# EAGLE board Eyetron (EAGLE 9.5.1)
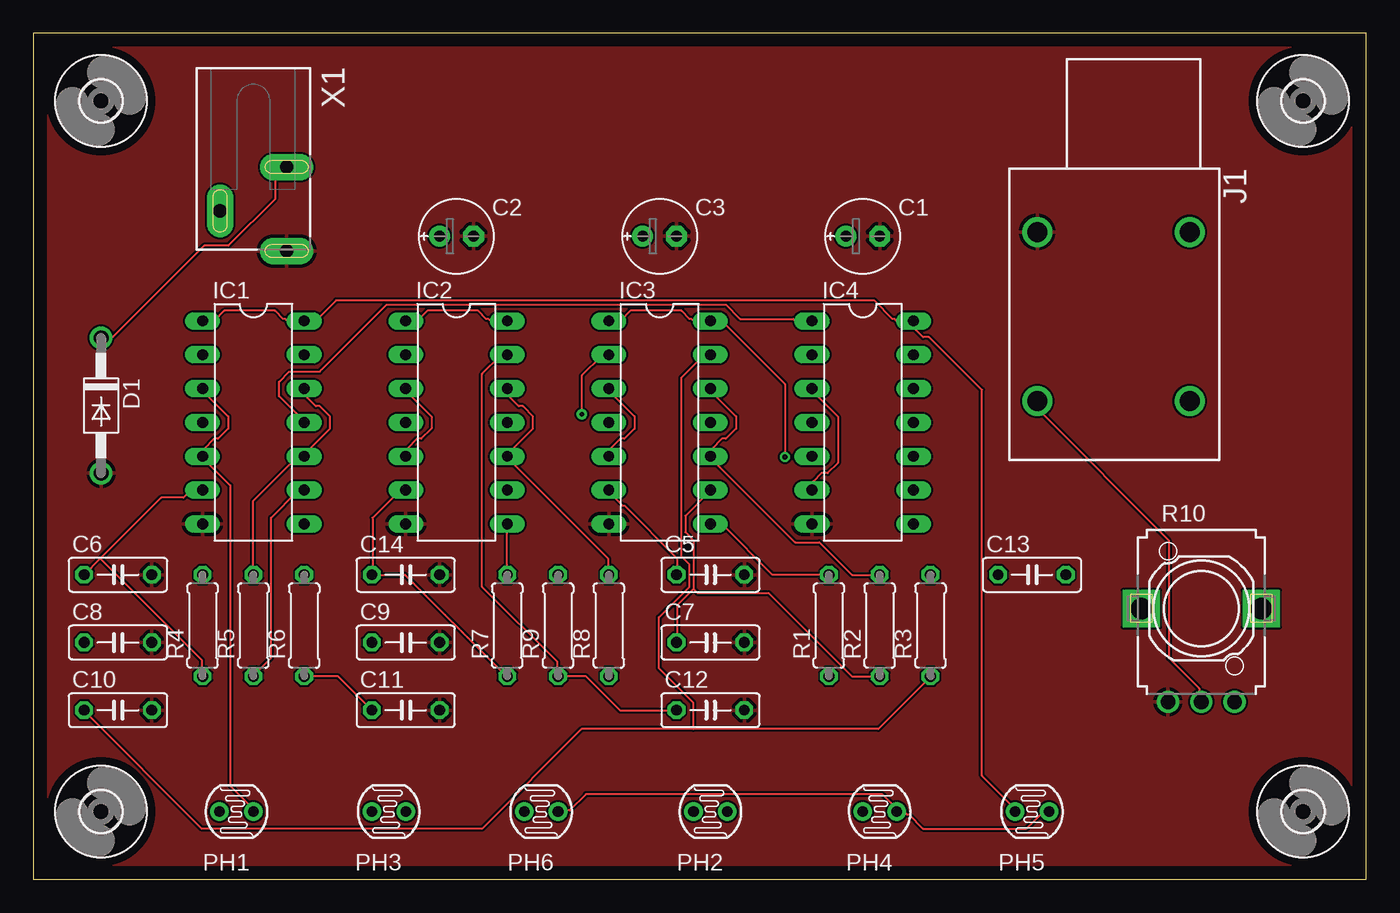
[diagram p0: board, top side]
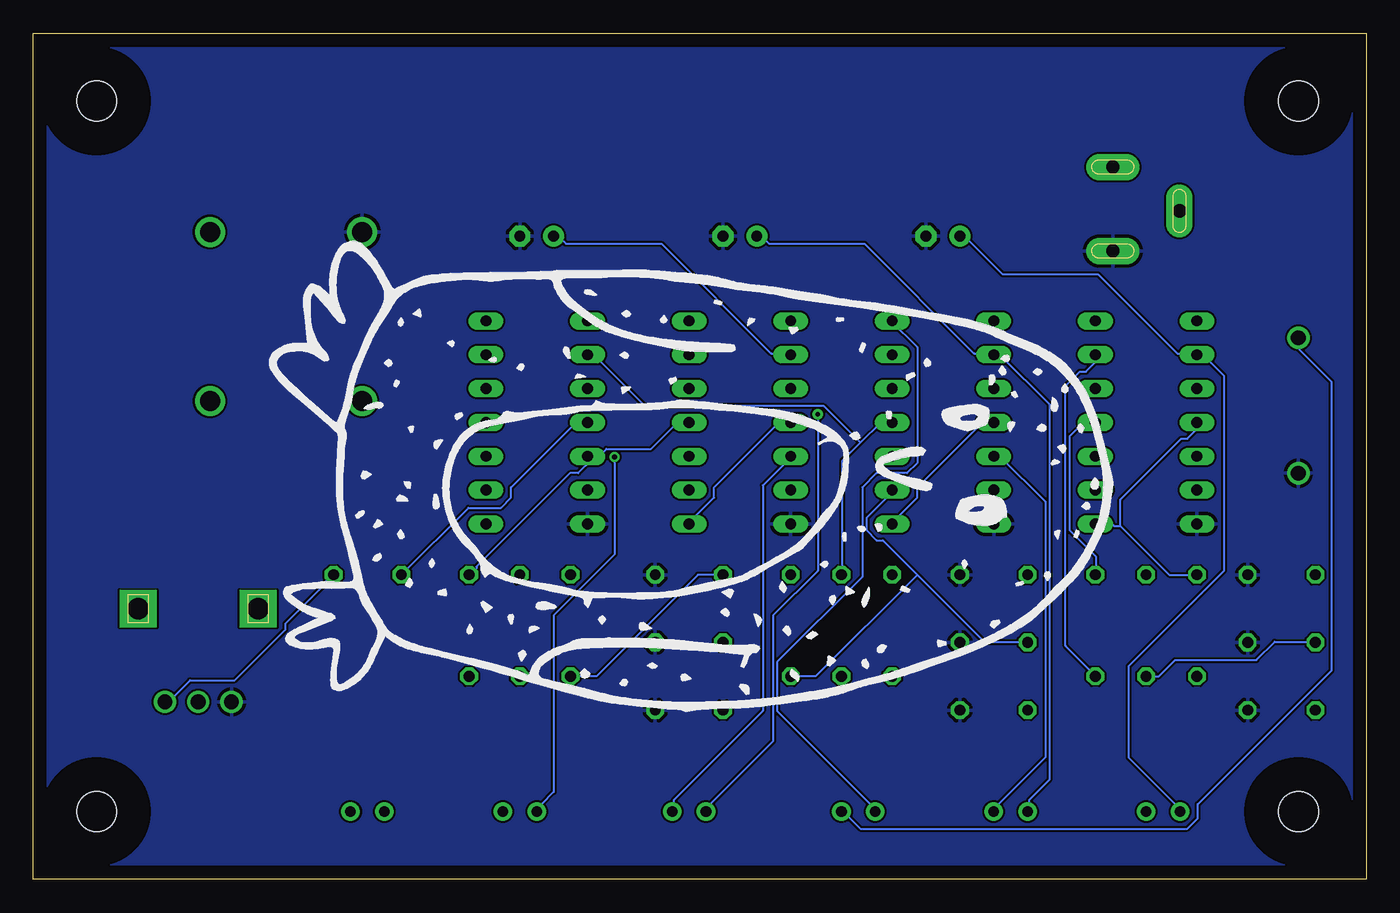
[diagram p1: board, bottom side, seen from below]

Size 100 x 63.49 mm. Coordinates in mm from the lower left corner, seen from the top.
Outline: 0,0 100,0 100,63.49 0,63.49 0,0
Copper layers (1*16): Top 0.035mm / dielectric 1.5mm / Bottom 0.035mm
Design rules "default": minimum track width 6mil, minimum drill 0.35mm, track to track 6mil, track to pad 6mil, pad to pad 6mil, via to via 6mil, smd to smd 6mil, copper to edge 40mil, drill to drill 6mil, minimum pad ring 10mil, minimum via ring 8mil, stop-mask expansion 4mil, vias tented up to drill 0mil, thermal gap 10mil

## Footprints (pad centres in the part's own frame; a part is rotated, then mirrored left to right if it is on the bottom)
E2,5-6E = drill 0.813 pad 1.575: + -1.27,0 | drill 0.813 pad 1.575 octagon: - 1.27,0
C050-025X075 = drill 0.813 octagon: 1 -2.54,0; 2 2.54,0
DO41-10 = drill 1.118: A 5.08,0; C -5.08,0
3,0 = hole 3: 0,0
DIL14 = drill 0.813 long: 1 -7.62,-3.81; 2 -5.08,-3.81; 3 -2.54,-3.81; 4 0,-3.81; 5 2.54,-3.81; 6 5.08,-3.81; 7 7.62,-3.81; 8 7.62,3.81; 9 5.08,3.81; 10 2.54,3.81; 11 0,3.81; 12 -2.54,3.81; 13 -5.08,3.81; 14 -7.62,3.81
NEUTRIK-NRJ4HM-1 = drill 1.5: S 7.23,4.75; SN -4.2,4.75; T 7.23,17.45; TN -4.2,17.45
VT900 = drill 0.8 pad 1.4: 1 -1.27,0; 2 1.27,0
0207/7 = drill 0.813 octagon: 1 -3.81,0; 2 3.81,0
EVUFXL = drill 1.1 pad 1.676: 1 -2.5,-7; 2 0,-7; 3 2.5,-7 | drill 1.6 pad 2.8 square: M1 4.5,0; M2 -4.5,0
SCD-014-A = drill 1 pad 2 long: 1 -2.5,13.8; 2 -2.5,7.5; 3 2.5,10.8

## Placement (x,y rotation side)
C1  100uf  [E2,5-6E]  62.23,48.26 0 top
C2  100uf  [E2,5-6E]  31.75,48.26 0 top
C3  100uf  [E2,5-6E]  46.99,48.26 0 top
C5  10uf  [C050-025X075]  50.8,22.86 0 top
C6  10uf  [C050-025X075]  6.35,22.86 0 top
C7  1uf  [C050-025X075]  50.8,17.78 0 top
C8  1uf  [C050-025X075]  6.35,17.78 0 top
C9  1uf  [C050-025X075]  27.94,17.78 0 top
C10  0.1uf  [C050-025X075]  6.35,12.7 0 top
C11  0.1uf  [C050-025X075]  27.94,12.7 0 top
C12  0.1uf  [C050-025X075]  50.8,12.7 0 top
C13  0.1uf  [C050-025X075]  74.93,22.86 0 top
C14  10uf  [C050-025X075]  27.94,22.86 0 top
D1  1N4001  [DO41-10]  5.08,35.56 270 top
H1  MOUNT-HOLE3.0  [3,0]  5.08,58.42 0 top
H2  MOUNT-HOLE3.0  [3,0]  5.08,5.08 0 top
H3  MOUNT-HOLE3.0  [3,0]  95.25,58.42 0 top
H4  MOUNT-HOLE3.0  [3,0]  95.25,5.08 0 top
IC1  4093N  [DIL14]  16.51,34.29 270 top
IC2  4093N  [DIL14]  31.75,34.29 270 top
IC3  4093N  [DIL14]  46.99,34.29 270 top
IC4  4077N  [DIL14]  62.23,34.29 270 top
J1  [NEUTRIK-NRJ4HM-1]  82.55,53.34 180 top
PH1  [VT900]  15.24,5.08 0 top
PH2  [VT900]  50.8,5.08 0 top
PH3  [VT900]  26.67,5.08 0 top
PH4  [VT900]  63.5,5.08 0 top
PH5  [VT900]  74.93,5.08 0 top
PH6  [VT900]  38.1,5.08 0 top
R1  22k  [0207/7]  59.69,19.05 90 top
R2  22k  [0207/7]  63.5,19.05 90 top
R3  22k  [0207/7]  67.31,19.05 90 top
R4  22k  [0207/7]  12.7,19.05 90 top
R5  22k  [0207/7]  16.51,19.05 90 top
R6  22k  [0207/7]  20.32,19.05 90 top
R7  22k  [0207/7]  35.56,19.05 90 top
R8  22k  [0207/7]  43.18,19.05 90 top
R9  22k  [0207/7]  39.37,19.05 90 top
R10  [EVUFXL]  87.63,20.32 0 top
X1  [SCD-014-A]  16.51,60.96 180 top

## Library data of the parts
C1-C3 C5-C14 = rcl; SPICEPREFIX: C
D1 = diode
H1-H4 = holes
IC1 IC2 IC4 = 40xx
IC3 = 40xx; SPICEPREFIX: J
J1 = Audio Jacks 0.25 inch
PH1-PH6 = photo-elements
R1-R9 = rcl; SPICEPREFIX: R
R10 = pot
X1 = con-shiua-chyuan; OC_FARNELL: unknown; OC_NEWARK: unknown

## Nets
GND: C1.- C2.- C3.- C5.2 C6.2 C7.2 C8.2 C9.2 C10.2 C11.2 C12.2 C14.2 D1.A IC1.7 IC2.7 IC3.7 IC4.7 J1.S R10.1 X1.1
N$1: IC1.11 IC4.1 R6.2
N$2: IC1.10 IC1.12 R5.2
N$3: IC1.4 IC1.8 R4.2
N$4: IC1.3 IC1.5 PH1.2
N$5: IC2.3 IC2.5 PH3.2
N$6: IC2.4 IC2.8 R7.2
N$7: IC2.10 IC2.12 R8.2
N$8: IC2.11 IC4.2 R9.2
N$9: IC4.3 IC4.6
N$10: IC3.3 IC3.5 PH2.2
N$11: IC3.4 IC3.8 R1.2
N$12: IC3.10 IC3.12 R2.2
N$13: IC3.11 IC4.5 R3.2
N$14: C1.+ IC3.2 PH2.1
N$15: C2.+ IC1.2 PH1.1
N$16: C3.+ IC2.2 PH3.1
N$17: C5.1 IC3.6 R1.1
N$19: C7.1 IC3.9 R2.1
N$20: IC3.1 IC3.14 PH4.1
N$21: C10.1 IC3.13 R3.1
N$22: IC1.1 IC1.14 IC4.14 PH5.1
N$23: C6.1 IC1.6 R4.1
N$24: C8.1 IC1.9 R5.1
N$25: C11.1 IC1.13 R6.1
N$26: C14.1 IC2.6 R7.1
N$27: C9.1 IC2.9 R8.1
N$28: C12.1 IC2.13 R9.1
N$29: IC2.1 IC2.14 PH6.1
N$30: D1.C PH4.2 PH5.2 PH6.2 X1.2
N$31: C13.1 IC4.4
N$32: C13.2 R10.3
N$33: J1.T R10.2

## Tracks (layer width: path | path; a pad name or v marks a point on that pad's centre or on a via)
GND
  pour Top: 0,63.5 100.33,63.5 100.33,0 2.54,0 0,0
  pour Bottom: 0,63.5 100.33,63.5 100.33,0 0,0
N$1
  Top 0.152: IC4.1 57.15,41.91 57,42.06 53.03,42.06 51.97,43.13 26.52,43.13 21.49,38.1 19.2,38.1 18.44,37.34 18.44,36.27 20.42,34.29 IC1.11
  Bottom 0.152: IC1.11 21.18,34.29 22.25,33.22 22.25,26.21 20.27,24.23 20.27,22.86 R6.2
N$2
  Top 0.152: R5.2 16.46,22.86 16.46,28.35 19.81,31.7 20.27,31.7 IC1.10 20.27,31.85 22.25,33.83 22.25,34.75 21.49,35.51 21.18,35.51 20.42,36.27 20.42,36.73 IC1.12
N$3
  Bottom 0.152: R4.2 14.78,22.86 18.44,26.52 | 18.44,26.52 18.9,26.52 19.05,26.67 IC1.8 | 18.44,26.52 18.44,28.5 13.87,33.07 13.41,33.07 12.8,33.68 12.8,34.29 IC1.4
N$4
  Top 0.152: IC1.3 12.65,36.73 14.63,34.75 14.63,33.83 13.87,33.07 13.56,33.07 12.8,32.31 12.8,31.85 IC1.5 12.65,31.7 14.78,29.57 14.78,7.01 16.15,5.64 16.15,5.49 16.46,5.18 PH1.2
N$5
  Top 0.152: IC2.5 28.04,31.85 28.04,32.31 28.8,33.07 29.11,33.07 29.87,33.83 29.87,34.75 27.89,36.73 IC2.3
  Bottom 0.152: PH3.2 27.89,5.18 27.58,5.49 27.58,5.64 24.08,9.14 24.08,28.35 27.43,31.7 27.89,31.7 IC2.5
N$6
  Top 0.152: R7.2 35.51,22.86 35.51,26.67 IC2.8
  Bottom 0.152: IC2.4 28.8,34.29 33.68,29.41 33.68,28.65 35.66,26.67 IC2.8
N$7
  Top 0.152: R8.2 43.13,22.86 43.13,24.08 35.51,31.7 IC2.10 35.51,31.85 37.49,33.83 37.49,34.75 36.73,35.51 36.42,35.51 35.66,36.27 35.66,36.73 IC2.12
N$8
  Bottom 0.152: 37.95,32.77 36.42,34.29 IC2.11 | 37.95,32.77 39.32,31.39 39.32,22.86 R9.2 | 37.95,32.77 40.69,35.51 54.1,35.51 57.91,39.32 58.37,39.32 IC4.2
N$9
  Top 0.152: IC4.6 58.52,29.26 58.52,29.87 59.13,30.48 59.59,30.48 60.35,31.24 60.35,34.75 58.37,36.73 IC4.3
N$10
  Top 0.152: IC3.5 43.28,31.85 43.28,32.31 44.04,33.07 44.35,33.07 45.11,33.83 45.11,34.75 43.13,36.73 IC3.3
  Bottom 0.152: PH2.2 51.97,5.18 51.97,5.94 45.26,12.65 45.26,29.57 43.13,31.7 IC3.5
N$11
  Top 0.152: IC3.8 51.66,26.67 55.47,22.86 R1.2
  Bottom 0.152: IC3.4 44.04,34.29 48.92,29.41 48.92,28.65 50.9,26.67 IC3.8
N$12
  Top 0.152: IC3.12 50.75,36.73 52.73,34.75 52.73,33.83 51.97,33.07 51.66,33.07 50.9,32.31 50.9,31.85 IC3.10 50.75,31.7 57.15,25.3 58.98,25.3 61.42,22.86 R2.2
N$13
  Bottom 0.152: IC3.11 51.66,34.29 53.65,32.31 57,32.31 57.45,31.85 58.37,31.85 IC4.5 58.52,31.7 58.52,31.09 59.13,30.48 59.74,30.48 66.75,23.47 66.75,23.32 67.21,22.86 R3.2
N$14  (via drill 0.35)
  Top 0.152: v41.15,34.9 41.15,37.8 42.67,39.32 43.13,39.32 IC3.2
  Bottom 0.152: IC3.2 43.28,39.47 44.65,39.47 52.88,47.7 60.05,47.7 60.5,48.16 60.96,48.16 C1.+ | v41.15,34.9 41.15,23.16 44.5,19.81 44.5,10.36 49.23,5.64 49.23,5.49 49.53,5.18 PH2.1
N$15
  Bottom 0.152: C2.+ 30.48,48.16 30.02,48.16 27.28,45.41 20.12,45.41 14.17,39.47 12.8,39.47 IC1.2 12.65,39.32 12.19,39.32 10.67,37.8 10.67,23.16 17.83,16 17.83,9.14 14.33,5.64 14.33,5.49 14.02,5.18 PH1.1
N$16
  Bottom 0.152: C3.+ 45.72,48.16 45.26,48.16 44.81,47.7 37.64,47.7 29.41,39.47 28.04,39.47 IC2.2 27.89,39.32 27.43,39.32 23.77,35.66 23.77,7.47 25.3,5.94 25.3,5.18 PH3.1
N$17
  Top 0.152: C5.1 48.31,22.86 48.31,24.08 44.35,28.04 44.2,28.04 43.13,29.11 IC3.6
  Bottom 0.152: R1.1 57.76,15.24 50.14,22.86 C5.1
N$19
  Top 0.152: 49.53,21.79 48.31,20.57 48.31,17.83 C7.1 | 49.53,21.79 49.53,25.45 48.92,26.06 48.92,27.28 50.75,29.11 IC3.9 | R2.1 61.42,15.24 55.17,21.49 49.84,21.49 49.53,21.79
N$20  (via drill 0.35)
  Top 0.152: IC3.1 44.04,41.91 44.81,42.67 48.62,42.67 49.23,42.06 49.38,42.06 49.53,41.91 IC3.14 51.66,41.91 56.39,37.19 v56.39,31.7
  Bottom 0.152: v56.39,31.7 56.39,24.38 60.96,19.81 60.96,6.55 61.87,5.64 61.87,5.49 62.18,5.18 PH4.1
N$21
  Top 0.152: 49.53,11.28 63.4,11.28 67.36,15.24 R3.1 | 49.53,11.28 41.15,11.28 33.68,3.81 12.65,3.81 3.81,12.65 C10.1 | 49.53,11.28 49.53,13.26 46.94,15.85 46.94,19.66 49.23,21.95 49.23,23.62 48.62,24.23 48.62,37.64 50.29,39.32 50.75,39.32 IC3.13
N$22
  Top 0.152: IC1.1 13.56,41.91 14.33,42.67 18.14,42.67 18.75,42.06 18.9,42.06 19.05,41.91 IC1.14 21.18,41.91 22.71,43.43 63.09,43.43 64.47,42.06 64.62,42.06 64.77,41.91 IC4.14 66.14,41.91 66.14,41.3 66.75,40.69 67.21,40.69 71.17,36.73 71.17,7.77 73.76,5.18 PH5.1
N$23
  Top 0.152: 5.03,24.08 9.6,28.65 11.28,28.65 11.73,29.11 12.65,29.11 IC1.6 | 5.03,24.08 C6.1 | 5.03,24.08 12.65,16.46 12.65,15.24 R4.1
N$24
  Top 0.152: IC1.9 20.27,29.11 19.81,29.11 17.83,27.13 17.83,16.61 16.46,15.24 R5.1
  Bottom 0.152: R5.1 15.54,15.24 14.33,16.46 8.23,16.46 6.86,17.83 3.81,17.83 C8.1
N$25
  Top 0.152: R6.1 22.86,15.24 C11.1
  Bottom 0.152: IC1.13 20.42,39.32 20.42,38.71 21.03,38.1 21.49,38.1 22.55,37.03 22.55,17.53 20.27,15.24 R6.1
N$26
  Top 0.152: 25.45,22.86 25.45,27.13 27.43,29.11 27.89,29.11 IC2.6 | 25.45,22.86 27.89,22.86 35.51,15.24 R7.1 | 25.45,22.86 C14.1
N$27
  Bottom 0.152: 33.68,22.86 36.27,25.45 36.73,25.45 37.49,26.21 37.49,27.13 35.51,29.11 IC2.9 | 33.68,22.86 28.65,17.83 25.45,17.83 C9.1 | R8.1 41.3,15.24 33.68,22.86
N$28
  Top 0.152: C12.1 48.16,12.65 44.04,12.65 41.45,15.24 R9.1 39.32,15.24 39.32,16.31 33.68,21.95 33.68,37.95 35.05,39.32 35.51,39.32 IC2.13
N$29
  Top 0.152: IC2.1 28.8,41.91 29.57,42.67 33.38,42.67 33.98,42.06 34.14,42.06 34.29,41.91 IC2.14
  Bottom 0.152: PH6.1 36.88,5.18 37.19,5.49 37.19,5.64 44.2,12.65 44.2,16.31 37.8,22.71 37.8,29.41 36.73,30.48 34.44,30.48 33.68,31.24 33.68,39.93 35.66,41.91 IC2.14
N$30
  Top 0.152: D1.C 5.18,40.69 5.94,40.69 12.8,47.55 14.63,47.55 18.14,51.05 18.14,52.58 18.9,53.34 X1.2 | PH6.2 39.47,5.18 40.23,5.18 41.45,6.4 63.7,6.4 64.77,5.33 PH4.2 64.77,5.03 65.38,5.03 65.53,4.88 65.68,4.88 66.75,3.81 74.52,3.81 75.74,5.03 76.2,5.03 PH5.2
  Bottom 0.152: D1.C 5.03,40.54 5.03,39.78 2.59,37.34 2.59,15.7 12.65,5.64 12.65,4.57 13.41,3.81 37.95,3.81 39.32,5.18 PH6.2
N$31
  Bottom 0.152: IC4.4 59.28,34.29 64.16,29.41 64.16,28.65 64.92,27.89 67.36,27.89 C13.1
N$32
  Bottom 0.152: C13.2 77.57,22.86 78.03,22.4 78.03,22.25 81.08,19.2 81.08,18.75 84.89,14.94 88.24,14.94 89.76,13.41 90.07,13.41 R10.3
N$33
  Top 0.152: R10.2 87.63,14.02 87.48,14.17 87.48,14.33 85.19,16.61 85.19,25.45 75.44,35.2 75.44,35.81 J1.T

## Text on the board
tValues: VauxFlores | EyeTron